# Altium PCB Updated MCU PCB.PcbDoc (part 1 of 2)
Units mil, origin at the board's own origin, x right, y up, seen from the top; angles counter-clockwise.
Board outline 6000 x 4000 mil, 2 copper layers (Top Layer, Bottom Layer); 43 components, 81 nets, 242 pads, 35 vias.
Unrouted connection lines stored in the file: 1.
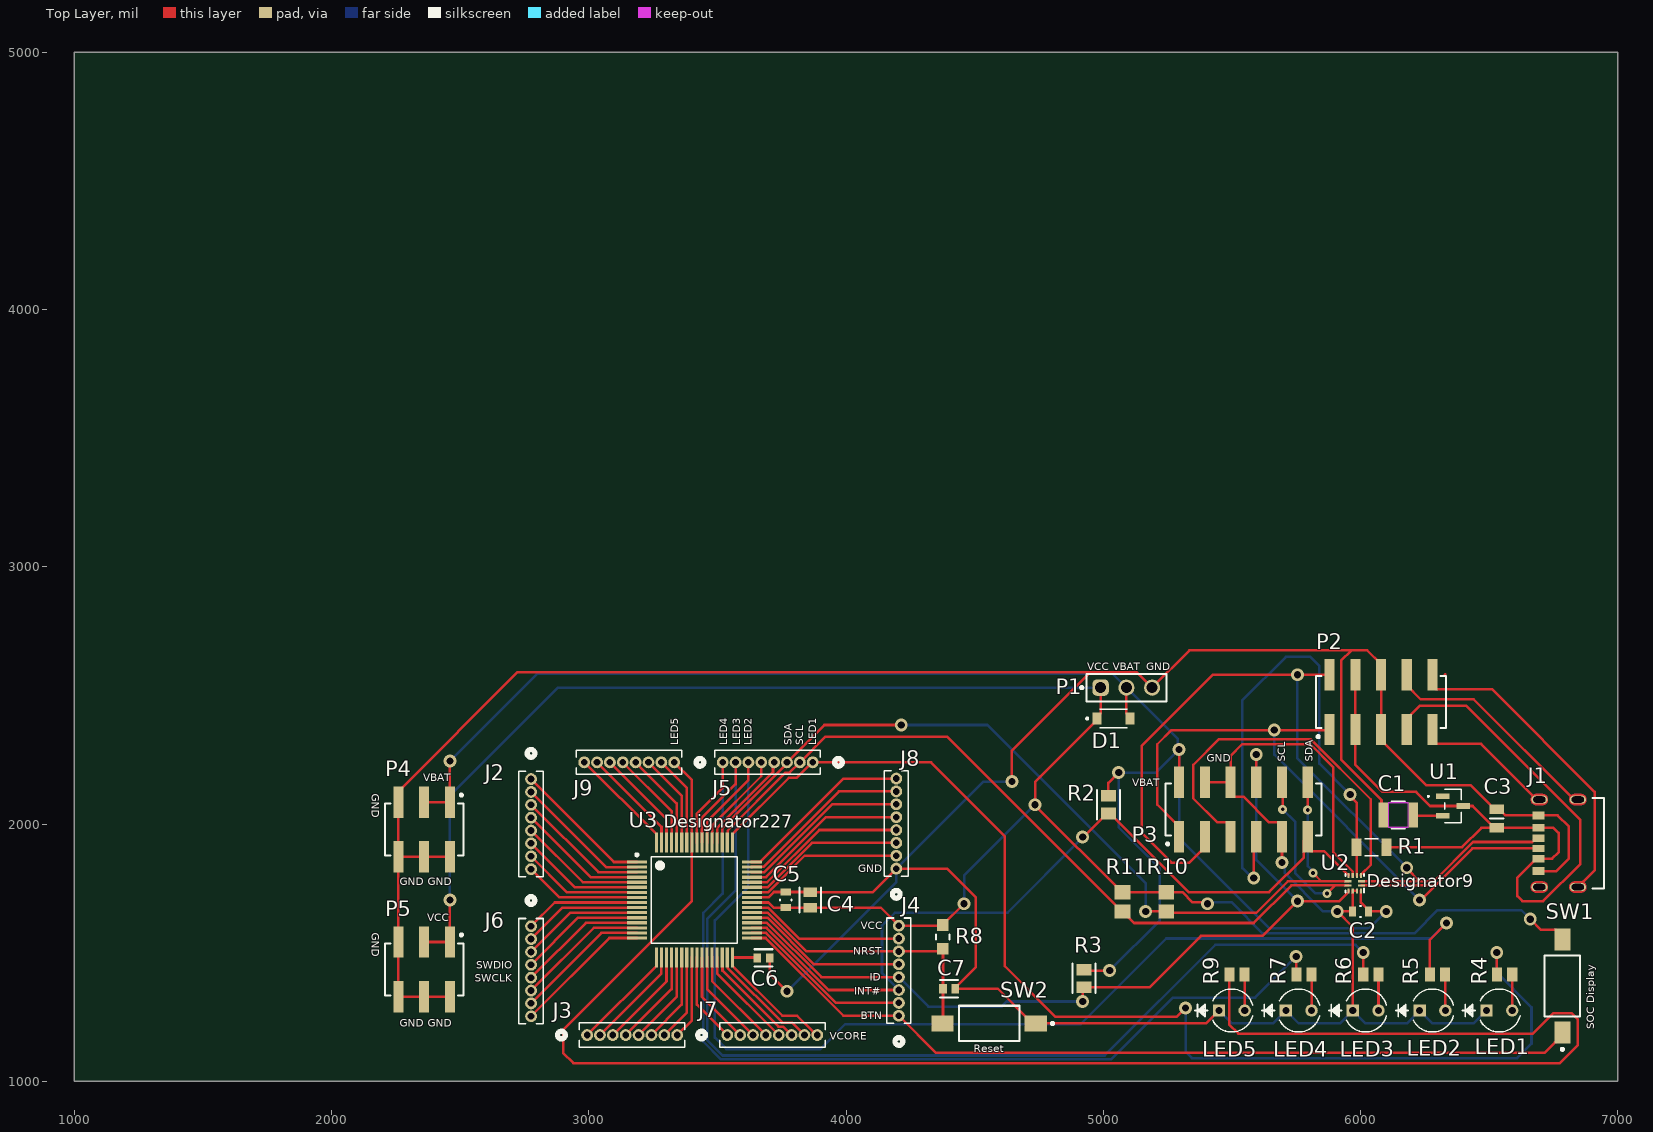
[diagram p0: Top Layer view]
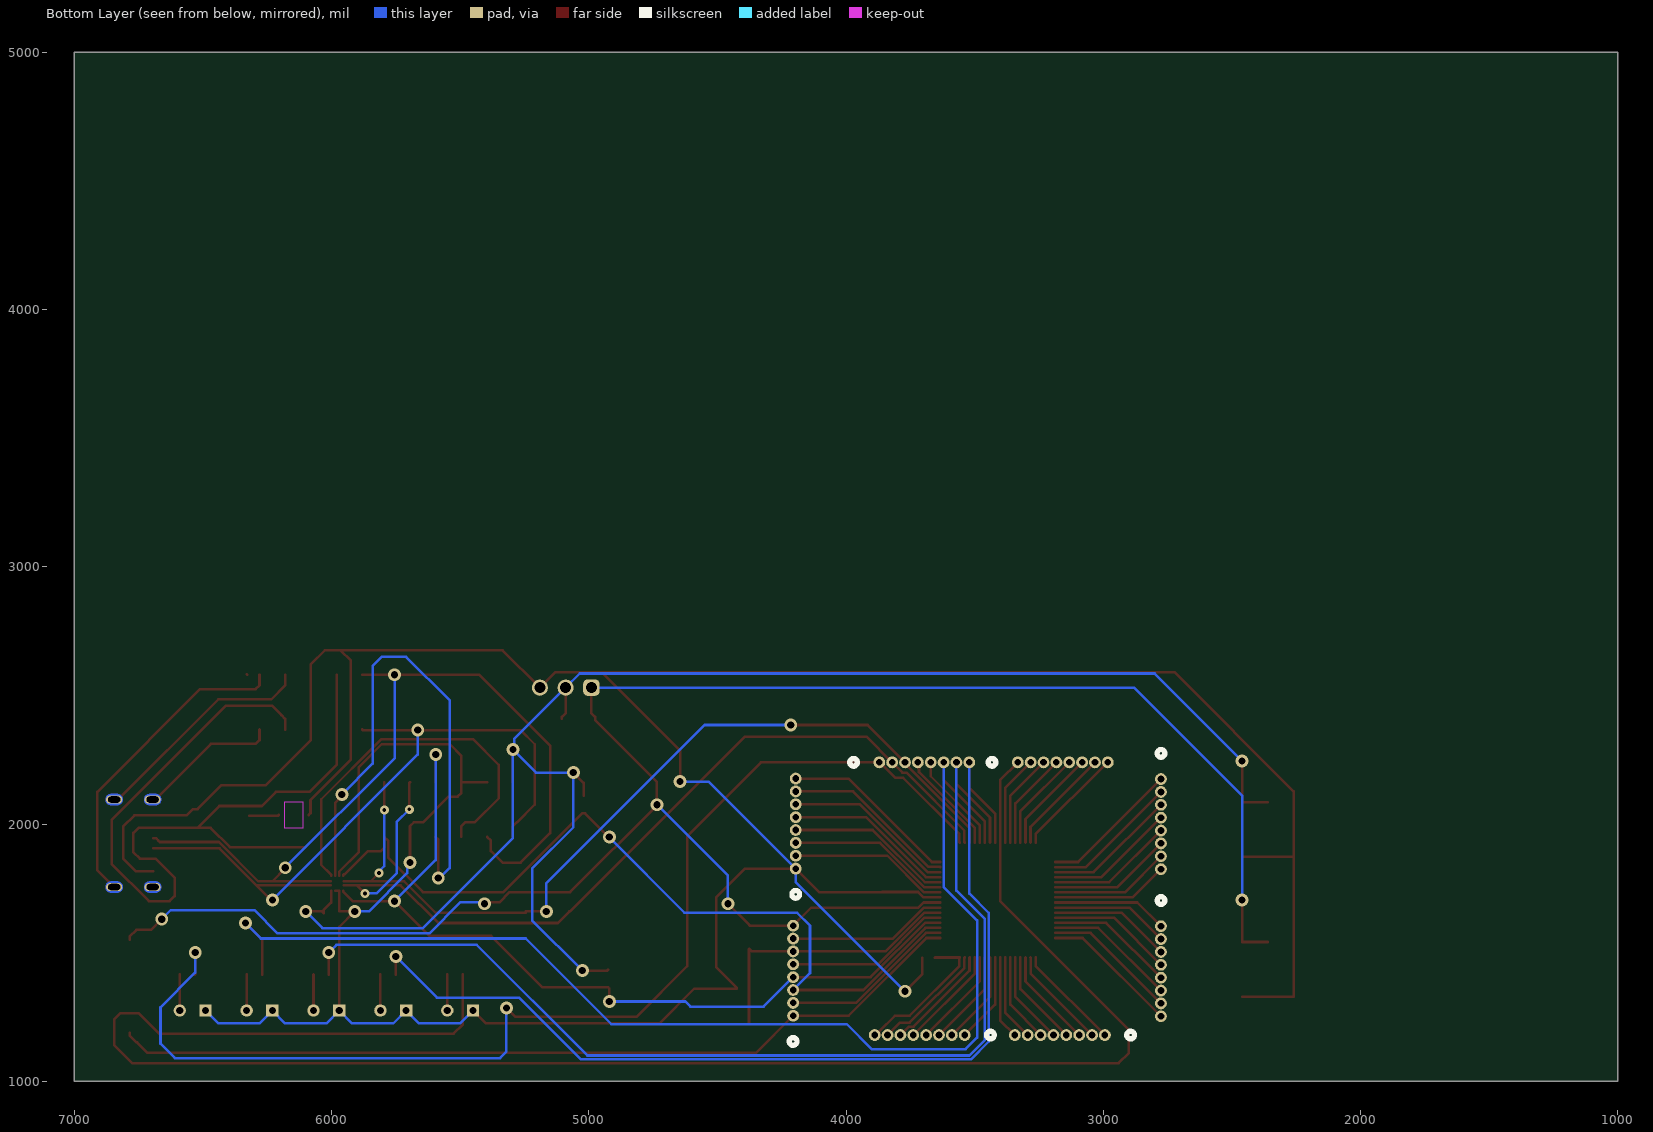
[diagram p1: Bottom Layer view, seen from below]
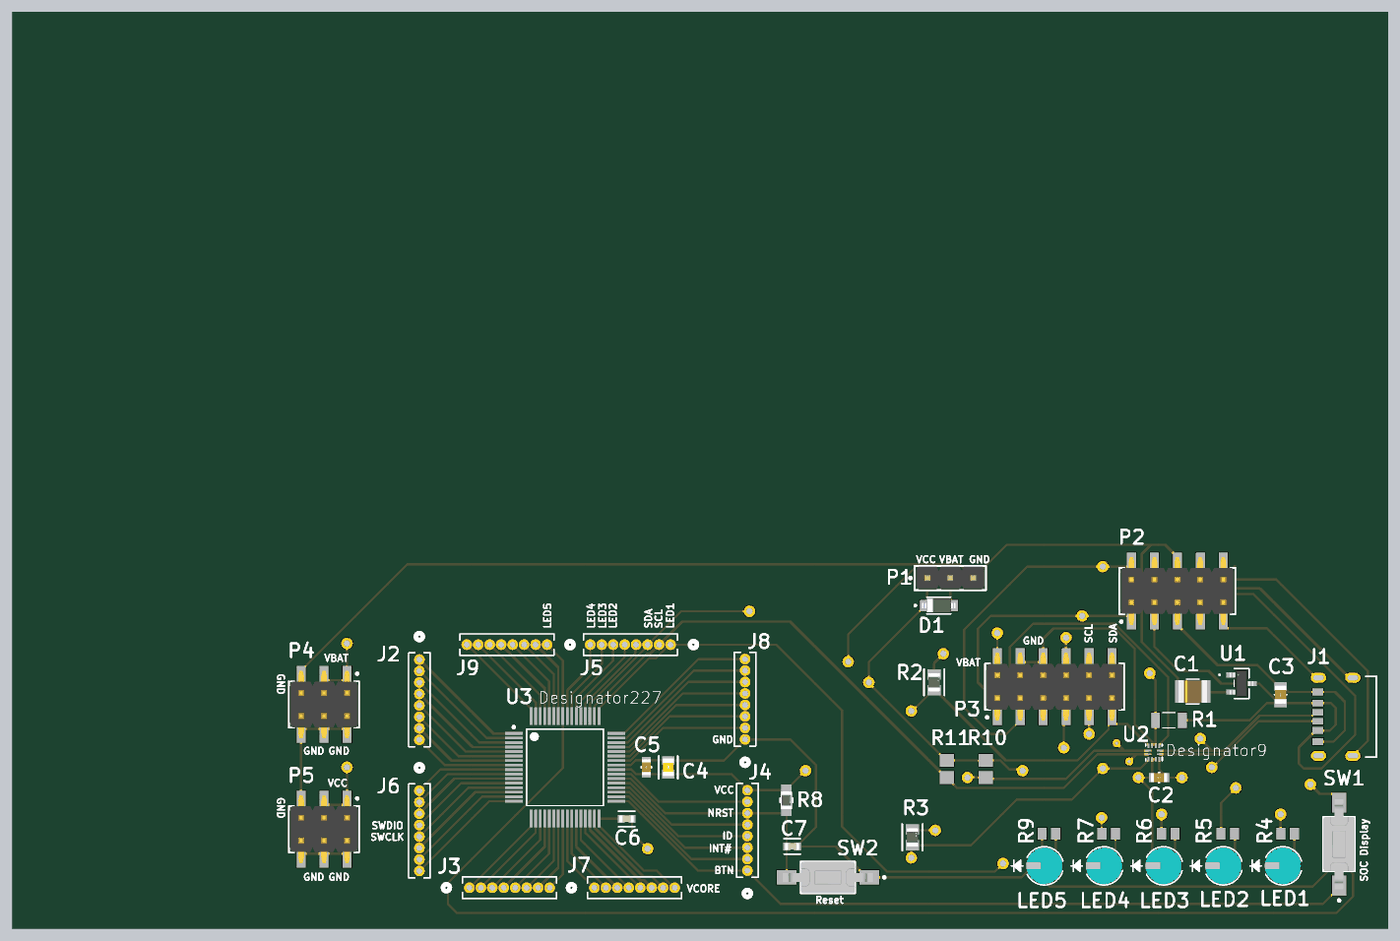
[diagram p2: 3D render of the assembled board from above, using the file's embedded part models]

## Layer stack, top to bottom
Top Solder: solder mask 0.4, Solder Resist, Dk 3.5
Top Layer: signal copper 1.4
Dielectric 1: dielectric 12.6, FR-4, Dk 4.8
Bottom Layer: signal copper 1.4
Bottom Solder: solder mask 0.4, Solder Resist, Dk 3.5

## Board outline
1000,1000 7000,1000 7000,5000 1000,5000

## Design rules (kind name [scope] priority, off if disabled: settings)
Clearance [All] p1: gap=5 ignorepadtopadclearanceinfootprint=FALSE
MinimumSolderMaskSliver [All] p1: minsoldermaskwidth=5
PolygonConnect [All] p1: connectstyle=Relief reliefconductorwidth=10 reliefentries=4 polygonreliefangle="90 Angle" airgapwidth=10
RoutingVias [All] p1: holewidth=28 width=50 viastyle="Through Hole" minholewidth=28 minwidth=50 maxholewidth=28 maxwidth=50
SilkToSilkClearance [All] p1: silktosilkclearance=5
SolderMaskExpansion [All] p1: expansion=4 istentingtop=FALSE
SupplyNets "Schematic Supply Nets_2" [InNet('VCC')] p1: voltage=0.000
SupplyNets "Schematic Supply Nets_1" [InNet('VDD')] p2: voltage=0.000
SupplyNets "Schematic Supply Nets" [InNet('ADDR')] p3: voltage=0.000
Width [All] p1: maxlimit=1000 minlimit=5 preferedwidth=10
28 further rules are at their usual default settings.

## Classes and differential pairs
component class "TUSB320 Schematic": C1 C2 C3 J1 P1 P2 P3 R1 R2 R3 U1 U2
component class "MCU Schematic": C4 C5 C6 C7 D1 J2 J3 J4 J5 J6 J7 J8 J9 LED1 LED2 LED3 LED4 LED5 P4 P5 R4 R5 R6 R7 R8 R9 R10 R11 SW1 SW2 U3

## Components (designator, comment, footprint, x,y, rotation, side; value= is the part's Value field where it differs from the comment)
C1 "150uF" CAP_CL32_SAM 6146.82,2035 r0 top
C2 "GRMJN65C1H104GE01J" FP-GRMJN6-0_1-MFG 6000,1660 r180 top
C3 "CC0805JKX7R9BB105" FP-CC0805-0_2-1_45-MFG 6530,2021.42 r90 top
C4 "C0805C106J8RACAUTO" FP-C0805C106J8RACAUTO-MFG 3860.58,1704.6 r90 top
C5 "GRMJN65C1H104GE01J" FP-GRMJN6-0_1-MFG 3765.58,1705.11 r90 top
C6 "C0603C474J4RACTU" FP-C0603C-CF-MFG 3679.2,1479.6 r0 top value="0.47 μF"
C7 "C0603C103J5RACTU" FP-C0603C-CF-MFG 4400.58,1359.6 r0 top value="10,000 pF"
D1 "MMSD914T1G" DIO_MMSD914T1G 5040,2410 r0 top
J1 "USB4125-GF-A-0190_REVA2" GCT_USB4125-GF-A-0190_REVA2 6813.5,1925.08 r90 top
J2 "GRPB081VWVN-RC" CONN8_VWVN-RC_SUL 2775.58,2174.6 r270 top
J3 "GRPB081VWVN-RC" CONN8_VWVN-RC_SUL 2993.53,1179.6 r0 top
J4 "GRPB081VWVN-RC" CONN8_VWVN-RC_SUL 4205.58,1254.6 r90 top
J5 "GRPB081VWVN-RC" CONN8_VWVN-RC_SUL 3870.58,2239.6 r180 top
J6 "GRPB081VWVN-RC" CONN8_VWVN-RC_SUL 2775.58,1602.6 r270 top
J7 "GRPB081VWVN-RC" CONN8_VWVN-RC_SUL 3538.53,1179.6 r0 top
J8 "GRPB081VWVN-RC" CONN8_VWVN-RC_SUL 4195.58,1826.6 r90 top
J9 "GRPB081VWVN-RC" CONN8_VWVN-RC_SUL 3332.14,2239.6 r180 top
LED1 "LTW-420D7" LED_LTW-420D7_LTO 6490,1275 r0 top
LED2 "LTW-420D7" LED_LTW-420D7_LTO 6230,1275 r0 top
LED3 "LTW-420D7" LED_LTW-420D7_LTO 5970,1275 r0 top
LED4 "LTW-420D7" LED_LTW-420D7_LTO 5710,1275 r0 top
LED5 "LTW-420D7" LED_LTW-420D7_LTO 5450,1275 r0 top
P1 "61300311121" 61300311121 5090,2530 r0 top
P2 "61001021121" 61001021121 6080,2473.7 r0 top
P3 "61001221121" 61001221121 5545,2056.3 r0 top
P4 "61000621121" 61000621121 2360,1978.7 r180 top
P5 "61000621121" 61000621121 2360,1435 r180 top
R1 "RT1206BRE07900KL" RESC3116X65N 6043.27,1910 r0 top value=900K
R2 "RG2012P-204-B-T5" FP-RG2012-IPC_B 5020,2075.53 r90 top
R3 "RG2012P-204-B-T5" FP-RG2012-IPC_B 4925,1399.47 r90 top
R4 "ERA6AEB331V" RESC2013X60X40LL20T25 6560.47,1415 r0 top value=330
R5 "ERA6AEB331V" RESC2013X60X40LL20T25 6299.53,1415 r0 top value=330
R6 "ERA6AEB331V" RESC2013X60X40LL20T25 6040.47,1415 r0 top value=330
R7 "ERA6AEB331V" RESC2013X60X40LL20T25 5780.47,1415 r0 top value=330
R8 "ERA-6AEB473V" FP-ERA6A-MFG 4375.58,1560.86 r90 top
R9 "ERA6AEB331V" RESC2013X60X40LL20T25 5520,1415 r0 top value=330
R10 "ERA6AEB472V" RESC2013X60X40ML20T25 5245,1697.6 r90 top value=4.7k
R11 "ERA6AEB472V" RESC2013X60X40ML20T25 5075,1697.6 r90 top value=4.7k
SW1 "FSMSM" TECO-FSMSM-2_V 6785,1370 r90 top
SW2 "FSMSM" TECO-FSMSM-2_V 4556.49,1224.6 r180 top
U1 "BSS138LT1G" SOT-23-3_1P4X3P040_ONS 6360,2070 r270 top
U2 "TI TUSB320" RWB0012A 5977.87,1769.53 r180 top
U3 "XMSM0G3507SPM" PM0064A-IPC_A 3410.58,1704.6 r0 top

## Footprints (in the part's own frame and the unit in brackets; to place one, negate y for a bottom-side part, rotate by r counter-clockwise, add the part's x,y. Pads: shape width x height; smd on the part's side, far side on the other; paste and mask are expansions set on the pad)
61000621121 [mm] "Pin Header, pitch 2.54 mm, SMD, Vertical, dual row, 6p"
  rect 1x3.1 smd: 1(-2.54,-2.7) 2(-2.54,2.7) 3(0,-2.7) 4(0,2.7) 5(2.54,-2.7) 6(2.54,2.7)
  silkscreen extent -3.89,-3.52 3.89,2.57, body extent -3.81,-3.75 3.81,3.75, height 9.62
61001021121 [mm] "Pin Header, pitch 2.54 mm, SMD, Vertical, dual row, 10p"
  rect 1x3.1 smd: 1(-5.08,-2.7) 2(-5.08,2.7) 3(-2.54,-2.7) 4(-2.54,2.7) 5(0,-2.7) 6(0,2.7) 7(2.54,-2.7) 8(2.54,2.7) 9(5.08,-2.7) 10(5.08,2.7)
  silkscreen extent -6.43,-3.52 6.43,2.57, body extent -6.35,-3.75 6.35,3.75, height 9.62
61001221121 [mm] "Pin Header, pitch 2.54 mm, SMD, Vertical, dual row, 12p"
  rect 1x3.1 smd: 1(-6.35,-2.7) 2(-6.35,2.7) 3(-3.81,-2.7) 4(-3.81,2.7) 5(-1.27,-2.7) 6(-1.27,2.7) 7(1.27,-2.7) 8(1.27,2.7) 9(3.81,-2.7) 10(3.81,2.7) 11(6.35,-2.7) 12(6.35,2.7)
  silkscreen extent -7.7,-3.52 7.7,2.57, body extent -7.62,-3.75 7.62,3.75, height 9.62
61300311121 [mm] "Pin Header, pitch 2.54 mm, THT, Vertical, single row, 3p"
  rrect50% 1.6x1.6 hole 1.1: 1(-2.54,0)
  round 1.6 hole 1.1: 2(0,0) 3(2.54,0)
  silkscreen extent -4.53,-1.35 3.96,1.35, body extent -3.81,-1.27 3.81,1.27, height 8.57
CAP_CL32_SAM [mm]
  rect 0.956x2.5 smd paste+0 mask+0: 1(-1.478,0) 2(1.478,0)
  Top Layer keep-out region: -0.949,-1.199 -0.949,1.199 0.949,1.199 0.949,-1.199
  Keep-Out Layer region: -0.949,-1.25 -0.949,1.25 0.949,1.25 0.949,-1.25
  silkscreen extent -0.69,-1.38 0.69,1.38, body extent -1.6,-1.25 1.6,1.25, height 1
CONN8_VWVN-RC_SUL [mil]
  round 46 / inner round 60 / far side round 46 hole 26 paste-99999 mask+0: 1(0,0) 2(50,0) 3(100,0) 4(150,0) 5(200,0) 6(250,0) 7(300,0) 8(350,0)
  silkscreen extent -115,-47 380,47
DIO_MMSD914T1G [mm]
  rect 0.915x1.22 smd: A(1.637,0) K(-1.637,0)
  silkscreen extent -2.7,-0.92 1.35,0.92, body extent -1.84,-0.8 1.84,0.8, height 1.35
FP-C0603C-CF-MFG [mm]
  rect 0.75x0.9 smd paste+0 mask+0: 1(-0.6,0) 2(0.6,0)
  silkscreen extent -0.87,-0.85 0.88,0.85, body extent -1.2,-0.6 1.2,0.6, height 0.25
FP-C0805C106J8RACAUTO-MFG [mm]
  rect 0.95x1.35 smd paste+0 mask+0: 1(-0.75,0) 2(0.75,0)
  silkscreen extent -1.25,-1.05 1.25,1.05, body extent -1.4,-0.85 1.4,0.85, height 0.25
FP-CC0805-0_2-1_45-MFG [mm]
  rect 0.95x1.4 smd paste+0 mask+0: 1(-0.925,0) 2(0.925,0)
  silkscreen extent 0,-0.67 0,0.67, body extent -1.73,-1.17 1.73,1.17, height 0.25
FP-ERA6A-MFG [mm]
  rect 1.15x1.15 smd paste+0 mask+0: 1(-1.175,0) 2(1.175,0)
  silkscreen extent -0.23,-0.67 0.23,0.67, body extent -1.85,-0.77 1.85,0.77, height 0.25
FP-GRMJN6-0_1-MFG [mm]
  rect 0.7x1 smd paste+0 mask+0: 1(-0.775,0) 2(0.775,0)
  silkscreen extent -0.05,-0.55 0.05,0.55, body extent -1.22,-0.65 1.22,0.65, height 0.25
FP-RG2012-IPC_B [mil]
  rect 45.47x57.33 smd paste+0 mask+0: 1(-34.47,0) 2(34.47,0)
  silkscreen extent -57,-44 57,44, body extent -67,-39 67,39, height 10
GCT_USB4125-GF-A-0190_REVA2 [mm]
  rect 0.7x1.2 smd: A5(-0.5,3.08) B5(0.5,3.08)
  rect 0.76x1.2 smd: A9(1.52,3.08) B9(-1.52,3.08)
  rect 0.8x1.2 smd: A12(2.75,3.08) B12(-2.75,3.08)
  oval 0.8x1.6 hole 0.6 slot 1.2 at 90 deg mask+0: S1(-4.32,3) S2(4.32,3) S3(-4.32,-0.8) S4(4.32,-0.8)
  Top Layer region: -4.291,0.049 -4.263,0.047 -4.234,0.043 -4.206,0.038 -4.178,0.031 -4.15,0.023 -4.123,0.013 -4.096,0.002 -4.07,-0.01 -4.045,-0.024 -4.02,-0.039 -3.997,-0.055 -3.974,-0.073 -3.952,-0.091 -3.931,-0.111 -3.911,-0.132 -3.893,-0.154 -3.875,-0.177 -3.859,-0.2 -3.844,-0.225 -3.83,-0.25 -3.818,-0.276 -3.807,-0.303 -3.797,-0.33 -3.789,-0.358 -3.782,-0.386 -3.777,-0.414 -3.773,-0.443 -3.771,-0.471 -3.77,-0.5 -3.77,-1.1 -3.771,-1.129 -3.773,-1.157 -3.777,-1.186 -3.782,-1.214 -3.789,-1.242 -3.797,-1.27 -3.807,-1.297 -3.818,-1.324 -3.83,-1.35 -3.844,-1.375 -3.859,-1.4 -3.875,-1.423 -3.893,-1.446 -3.911,-1.468 -3.931,-1.489 -3.952,-1.509 -3.974,-1.527 -3.997,-1.545 -4.02,-1.561 -4.045,-1.576 -4.07,-1.59 -4.096,-1.602 -4.123,-1.613 -4.15,-1.623 -4.178,-1.631 -4.206,-1.638 -4.234,-1.643 -4.263,-1.647 -4.291,-1.649 -4.32,-1.65 -4.349,-1.649 -4.377,-1.647 -4.406,-1.643 -4.434,-1.638 -4.462,-1.631 -4.49,-1.623 -4.517,-1.613 -4.544,-1.602 -4.57,-1.59 -4.595,-1.576 -4.62,-1.561 -4.643,-1.545 -4.666,-1.527 -4.688,-1.509 -4.709,-1.489 -4.729,-1.468 -4.747,-1.446 -4.765,-1.423 -4.781,-1.4 -4.796,-1.375 -4.81,-1.35 -4.822,-1.324 -4.833,-1.297 -4.843,-1.27 -4.851,-1.242 -4.858,-1.214 -4.863,-1.186 -4.867,-1.157 -4.869,-1.129 -4.87,-1.1 -4.87,-0.5 -4.869,-0.471 -4.867,-0.443 -4.863,-0.414 -4.858,-0.386 -4.851,-0.358 -4.843,-0.33 -4.833,-0.303 -4.822,-0.276 -4.81,-0.25 -4.796,-0.225 -4.781,-0.2 -4.765,-0.177 -4.747,-0.154 -4.729,-0.132 -4.709,-0.111 -4.688,-0.091 -4.666,-0.073 -4.643,-0.055 -4.62,-0.039 -4.595,-0.024 -4.57,-0.01 -4.544,0.002 -4.517,0.013 -4.49,0.023 -4.462,0.031 -4.434,0.038 -4.406,0.043 -4.377,0.047 -4.349,0.049 -4.32,0.05
  Top Layer region: 4.349,0.049 4.377,0.047 4.406,0.043 4.434,0.038 4.462,0.031 4.49,0.023 4.517,0.013 4.544,0.002 4.57,-0.01 4.595,-0.024 4.62,-0.039 4.643,-0.055 4.666,-0.073 4.688,-0.091 4.709,-0.111 4.729,-0.132 4.747,-0.154 4.765,-0.177 4.781,-0.2 4.796,-0.225 4.81,-0.25 4.822,-0.276 4.833,-0.303 4.843,-0.33 4.851,-0.358 4.858,-0.386 4.863,-0.414 4.867,-0.443 4.869,-0.471 4.87,-0.5 4.87,-1.1 4.869,-1.129 4.867,-1.157 4.863,-1.186 4.858,-1.214 4.851,-1.242 4.843,-1.27 4.833,-1.297 4.822,-1.324 4.81,-1.35 4.796,-1.375 4.781,-1.4 4.765,-1.423 4.747,-1.446 4.729,-1.468 4.709,-1.489 4.688,-1.509 4.666,-1.527 4.643,-1.545 4.62,-1.561 4.595,-1.576 4.57,-1.59 4.544,-1.602 4.517,-1.613 4.49,-1.623 4.462,-1.631 4.434,-1.638 4.406,-1.643 4.377,-1.647 4.349,-1.649 4.32,-1.65 4.291,-1.649 4.263,-1.647 4.234,-1.643 4.206,-1.638 4.178,-1.631 4.15,-1.623 4.123,-1.613 4.096,-1.602 4.07,-1.59 4.045,-1.576 4.02,-1.561 3.997,-1.545 3.974,-1.527 3.952,-1.509 3.931,-1.489 3.911,-1.468 3.893,-1.446 3.875,-1.423 3.859,-1.4 3.844,-1.375 3.83,-1.35 3.818,-1.324 3.807,-1.297 3.797,-1.27 3.789,-1.242 3.782,-1.214 3.777,-1.186 3.773,-1.157 3.771,-1.129 3.77,-1.1 3.77,-0.5 3.771,-0.471 3.773,-0.443 3.777,-0.414 3.782,-0.386 3.789,-0.358 3.797,-0.33 3.807,-0.303 3.818,-0.276 3.83,-0.25 3.844,-0.225 3.859,-0.2 3.875,-0.177 3.893,-0.154 3.911,-0.132 3.931,-0.111 3.952,-0.091 3.974,-0.073 3.997,-0.055 4.02,-0.039 4.045,-0.024 4.07,-0.01 4.096,0.002 4.123,0.013 4.15,0.023 4.178,0.031 4.206,0.038 4.234,0.043 4.263,0.047 4.291,0.049 4.32,0.05
  Top Layer region: -4.291,3.849 -4.263,3.847 -4.234,3.843 -4.206,3.838 -4.178,3.831 -4.15,3.823 -4.123,3.813 -4.096,3.802 -4.07,3.79 -4.045,3.776 -4.02,3.761 -3.997,3.745 -3.974,3.727 -3.952,3.709 -3.931,3.689 -3.911,3.668 -3.893,3.646 -3.875,3.623 -3.859,3.6 -3.844,3.575 -3.83,3.55 -3.818,3.524 -3.807,3.497 -3.797,3.47 -3.789,3.442 -3.782,3.414 -3.777,3.386 -3.773,3.357 -3.771,3.329 -3.77,3.3 -3.77,2.7 -3.771,2.671 -3.773,2.643 -3.777,2.614 -3.782,2.586 -3.789,2.558 -3.797,2.53 -3.807,2.503 -3.818,2.476 -3.83,2.45 -3.844,2.425 -3.859,2.4 -3.875,2.377 -3.893,2.354 -3.911,2.332 -3.931,2.311 -3.952,2.291 -3.974,2.273 -3.997,2.255 -4.02,2.239 -4.045,2.224 -4.07,2.21 -4.096,2.198 -4.123,2.187 -4.15,2.177 -4.178,2.169 -4.206,2.162 -4.234,2.157 -4.263,2.153 -4.291,2.151 -4.32,2.15 -4.349,2.151 -4.377,2.153 -4.406,2.157 -4.434,2.162 -4.462,2.169 -4.49,2.177 -4.517,2.187 -4.544,2.198 -4.57,2.21 -4.595,2.224 -4.62,2.239 -4.643,2.255 -4.666,2.273 -4.688,2.291 -4.709,2.311 -4.729,2.332 -4.747,2.354 -4.765,2.377 -4.781,2.4 -4.796,2.425 -4.81,2.45 -4.822,2.476 -4.833,2.503 -4.843,2.53 -4.851,2.558 -4.858,2.586 -4.863,2.614 -4.867,2.643 -4.869,2.671 -4.87,2.7 -4.87,3.3 -4.869,3.329 -4.867,3.357 -4.863,3.386 -4.858,3.414 -4.851,3.442 -4.843,3.47 -4.833,3.497 -4.822,3.524 -4.81,3.55 -4.796,3.575 -4.781,3.6 -4.765,3.623 -4.747,3.646 -4.729,3.668 -4.709,3.689 -4.688,3.709 -4.666,3.727 -4.643,3.745 -4.62,3.761 -4.595,3.776 -4.57,3.79 -4.544,3.802 -4.517,3.813 -4.49,3.823 -4.462,3.831 -4.434,3.838 -4.406,3.843 -4.377,3.847 -4.349,3.849 -4.32,3.85
  Top Layer region: 4.349,3.849 4.377,3.847 4.406,3.843 4.434,3.838 4.462,3.831 4.49,3.823 4.517,3.813 4.544,3.802 4.57,3.79 4.595,3.776 4.62,3.761 4.643,3.745 4.666,3.727 4.688,3.709 4.709,3.689 4.729,3.668 4.747,3.646 4.765,3.623 4.781,3.6 4.796,3.575 4.81,3.55 4.822,3.524 4.833,3.497 4.843,3.47 4.851,3.442 4.858,3.414 4.863,3.386 4.867,3.357 4.869,3.329 4.87,3.3 4.87,2.7 4.869,2.671 4.867,2.643 4.863,2.614 4.858,2.586 4.851,2.558 4.843,2.53 4.833,2.503 4.822,2.476 4.81,2.45 4.796,2.425 4.781,2.4 4.765,2.377 4.747,2.354 4.729,2.332 4.709,2.311 4.688,2.291 4.666,2.273 4.643,2.255 4.62,2.239 4.595,2.224 4.57,2.21 4.544,2.198 4.517,2.187 4.49,2.177 4.462,2.169 4.434,2.162 4.406,2.157 4.377,2.153 4.349,2.151 4.32,2.15 4.291,2.151 4.263,2.153 4.234,2.157 4.206,2.162 4.178,2.169 4.15,2.177 4.123,2.187 4.096,2.198 4.07,2.21 4.045,2.224 4.02,2.239 3.997,2.255 3.974,2.273 3.952,2.291 3.931,2.311 3.911,2.332 3.893,2.354 3.875,2.377 3.859,2.4 3.844,2.425 3.83,2.45 3.818,2.476 3.807,2.503 3.797,2.53 3.789,2.558 3.782,2.586 3.777,2.614 3.773,2.643 3.771,2.671 3.77,2.7 3.77,3.3 3.771,3.329 3.773,3.357 3.777,3.386 3.782,3.414 3.789,3.442 3.797,3.47 3.807,3.497 3.818,3.524 3.83,3.55 3.844,3.575 3.859,3.6 3.875,3.623 3.893,3.646 3.911,3.668 3.931,3.689 3.952,3.709 3.974,3.727 3.997,3.745 4.02,3.761 4.045,3.776 4.07,3.79 4.096,3.802 4.123,3.813 4.15,3.823 4.178,3.831 4.206,3.838 4.234,3.843 4.263,3.847 4.291,3.849 4.32,3.85
  Bottom Layer region: -4.291,0.049 -4.263,0.047 -4.234,0.043 -4.206,0.038 -4.178,0.031 -4.15,0.023 -4.123,0.013 -4.096,0.002 -4.07,-0.01 -4.045,-0.024 -4.02,-0.039 -3.997,-0.055 -3.974,-0.073 -3.952,-0.091 -3.931,-0.111 -3.911,-0.132 -3.893,-0.154 -3.875,-0.177 -3.859,-0.2 -3.844,-0.225 -3.83,-0.25 -3.818,-0.276 -3.807,-0.303 -3.797,-0.33 -3.789,-0.358 -3.782,-0.386 -3.777,-0.414 -3.773,-0.443 -3.771,-0.471 -3.77,-0.5 -3.77,-1.1 -3.771,-1.129 -3.773,-1.157 -3.777,-1.186 -3.782,-1.214 -3.789,-1.242 -3.797,-1.27 -3.807,-1.297 -3.818,-1.324 -3.83,-1.35 -3.844,-1.375 -3.859,-1.4 -3.875,-1.423 -3.893,-1.446 -3.911,-1.468 -3.931,-1.489 -3.952,-1.509 -3.974,-1.527 -3.997,-1.545 -4.02,-1.561 -4.045,-1.576 -4.07,-1.59 -4.096,-1.602 -4.123,-1.613 -4.15,-1.623 -4.178,-1.631 -4.206,-1.638 -4.234,-1.643 -4.263,-1.647 -4.291,-1.649 -4.32,-1.65 -4.349,-1.649 -4.377,-1.647 -4.406,-1.643 -4.434,-1.638 -4.462,-1.631 -4.49,-1.623 -4.517,-1.613 -4.544,-1.602 -4.57,-1.59 -4.595,-1.576 -4.62,-1.561 -4.643,-1.545 -4.666,-1.527 -4.688,-1.509 -4.709,-1.489 -4.729,-1.468 -4.747,-1.446 -4.765,-1.423 -4.781,-1.4 -4.796,-1.375 -4.81,-1.35 -4.822,-1.324 -4.833,-1.297 -4.843,-1.27 -4.851,-1.242 -4.858,-1.214 -4.863,-1.186 -4.867,-1.157 -4.869,-1.129 -4.87,-1.1 -4.87,-0.5 -4.869,-0.471 -4.867,-0.443 -4.863,-0.414 -4.858,-0.386 -4.851,-0.358 -4.843,-0.33 -4.833,-0.303 -4.822,-0.276 -4.81,-0.25 -4.796,-0.225 -4.781,-0.2 -4.765,-0.177 -4.747,-0.154 -4.729,-0.132 -4.709,-0.111 -4.688,-0.091 -4.666,-0.073 -4.643,-0.055 -4.62,-0.039 -4.595,-0.024 -4.57,-0.01 -4.544,0.002 -4.517,0.013 -4.49,0.023 -4.462,0.031 -4.434,0.038 -4.406,0.043 -4.377,0.047 -4.349,0.049 -4.32,0.05
  Bottom Layer region: 4.349,0.049 4.377,0.047 4.406,0.043 4.434,0.038 4.462,0.031 4.49,0.023 4.517,0.013 4.544,0.002 4.57,-0.01 4.595,-0.024 4.62,-0.039 4.643,-0.055 4.666,-0.073 4.688,-0.091 4.709,-0.111 4.729,-0.132 4.747,-0.154 4.765,-0.177 4.781,-0.2 4.796,-0.225 4.81,-0.25 4.822,-0.276 4.833,-0.303 4.843,-0.33 4.851,-0.358 4.858,-0.386 4.863,-0.414 4.867,-0.443 4.869,-0.471 4.87,-0.5 4.87,-1.1 4.869,-1.129 4.867,-1.157 4.863,-1.186 4.858,-1.214 4.851,-1.242 4.843,-1.27 4.833,-1.297 4.822,-1.324 4.81,-1.35 4.796,-1.375 4.781,-1.4 4.765,-1.423 4.747,-1.446 4.729,-1.468 4.709,-1.489 4.688,-1.509 4.666,-1.527 4.643,-1.545 4.62,-1.561 4.595,-1.576 4.57,-1.59 4.544,-1.602 4.517,-1.613 4.49,-1.623 4.462,-1.631 4.434,-1.638 4.406,-1.643 4.377,-1.647 4.349,-1.649 4.32,-1.65 4.291,-1.649 4.263,-1.647 4.234,-1.643 4.206,-1.638 4.178,-1.631 4.15,-1.623 4.123,-1.613 4.096,-1.602 4.07,-1.59 4.045,-1.576 4.02,-1.561 3.997,-1.545 3.974,-1.527 3.952,-1.509 3.931,-1.489 3.911,-1.468 3.893,-1.446 3.875,-1.423 3.859,-1.4 3.844,-1.375 3.83,-1.35 3.818,-1.324 3.807,-1.297 3.797,-1.27 3.789,-1.242 3.782,-1.214 3.777,-1.186 3.773,-1.157 3.771,-1.129 3.77,-1.1 3.77,-0.5 3.771,-0.471 3.773,-0.443 3.777,-0.414 3.782,-0.386 3.789,-0.358 3.797,-0.33 3.807,-0.303 3.818,-0.276 3.83,-0.25 3.844,-0.225 3.859,-0.2 3.875,-0.177 3.893,-0.154 3.911,-0.132 3.931,-0.111 3.952,-0.091 3.974,-0.073 3.997,-0.055 4.02,-0.039 4.045,-0.024 4.07,-0.01 4.096,0.002 4.123,0.013 4.15,0.023 4.178,0.031 4.206,0.038 4.234,0.043 4.263,0.047 4.291,0.049 4.32,0.05
  Bottom Layer region: -4.291,3.849 -4.263,3.847 -4.234,3.843 -4.206,3.838 -4.178,3.831 -4.15,3.823 -4.123,3.813 -4.096,3.802 -4.07,3.79 -4.045,3.776 -4.02,3.761 -3.997,3.745 -3.974,3.727 -3.952,3.709 -3.931,3.689 -3.911,3.668 -3.893,3.646 -3.875,3.623 -3.859,3.6 -3.844,3.575 -3.83,3.55 -3.818,3.524 -3.807,3.497 -3.797,3.47 -3.789,3.442 -3.782,3.414 -3.777,3.386 -3.773,3.357 -3.771,3.329 -3.77,3.3 -3.77,2.7 -3.771,2.671 -3.773,2.643 -3.777,2.614 -3.782,2.586 -3.789,2.558 -3.797,2.53 -3.807,2.503 -3.818,2.476 -3.83,2.45 -3.844,2.425 -3.859,2.4 -3.875,2.377 -3.893,2.354 -3.911,2.332 -3.931,2.311 -3.952,2.291 -3.974,2.273 -3.997,2.255 -4.02,2.239 -4.045,2.224 -4.07,2.21 -4.096,2.198 -4.123,2.187 -4.15,2.177 -4.178,2.169 -4.206,2.162 -4.234,2.157 -4.263,2.153 -4.291,2.151 -4.32,2.15 -4.349,2.151 -4.377,2.153 -4.406,2.157 -4.434,2.162 -4.462,2.169 -4.49,2.177 -4.517,2.187 -4.544,2.198 -4.57,2.21 -4.595,2.224 -4.62,2.239 -4.643,2.255 -4.666,2.273 -4.688,2.291 -4.709,2.311 -4.729,2.332 -4.747,2.354 -4.765,2.377 -4.781,2.4 -4.796,2.425 -4.81,2.45 -4.822,2.476 -4.833,2.503 -4.843,2.53 -4.851,2.558 -4.858,2.586 -4.863,2.614 -4.867,2.643 -4.869,2.671 -4.87,2.7 -4.87,3.3 -4.869,3.329 -4.867,3.357 -4.863,3.386 -4.858,3.414 -4.851,3.442 -4.843,3.47 -4.833,3.497 -4.822,3.524 -4.81,3.55 -4.796,3.575 -4.781,3.6 -4.765,3.623 -4.747,3.646 -4.729,3.668 -4.709,3.689 -4.688,3.709 -4.666,3.727 -4.643,3.745 -4.62,3.761 -4.595,3.776 -4.57,3.79 -4.544,3.802 -4.517,3.813 -4.49,3.823 -4.462,3.831 -4.434,3.838 -4.406,3.843 -4.377,3.847 -4.349,3.849 -4.32,3.85
  Bottom Layer region: 4.349,3.849 4.377,3.847 4.406,3.843 4.434,3.838 4.462,3.831 4.49,3.823 4.517,3.813 4.544,3.802 4.57,3.79 4.595,3.776 4.62,3.761 4.643,3.745 4.666,3.727 4.688,3.709 4.709,3.689 4.729,3.668 4.747,3.646 4.765,3.623 4.781,3.6 4.796,3.575 4.81,3.55 4.822,3.524 4.833,3.497 4.843,3.47 4.851,3.442 4.858,3.414 4.863,3.386 4.867,3.357 4.869,3.329 4.87,3.3 4.87,2.7 4.869,2.671 4.867,2.643 4.863,2.614 4.858,2.586 4.851,2.558 4.843,2.53 4.833,2.503 4.822,2.476 4.81,2.45 4.796,2.425 4.781,2.4 4.765,2.377 4.747,2.354 4.729,2.332 4.709,2.311 4.688,2.291 4.666,2.273 4.643,2.255 4.62,2.239 4.595,2.224 4.57,2.21 4.544,2.198 4.517,2.187 4.49,2.177 4.462,2.169 4.434,2.162 4.406,2.157 4.377,2.153 4.349,2.151 4.32,2.15 4.291,2.151 4.263,2.153 4.234,2.157 4.206,2.162 4.178,2.169 4.15,2.177 4.123,2.187 4.096,2.198 4.07,2.21 4.045,2.224 4.02,2.239 3.997,2.255 3.974,2.273 3.952,2.291 3.931,2.311 3.911,2.332 3.893,2.354 3.875,2.377 3.859,2.4 3.844,2.425 3.83,2.45 3.818,2.476 3.807,2.503 3.797,2.53 3.789,2.558 3.782,2.586 3.777,2.614 3.773,2.643 3.771,2.671 3.77,2.7 3.77,3.3 3.771,3.329 3.773,3.357 3.777,3.386 3.782,3.414 3.789,3.442 3.797,3.47 3.807,3.497 3.818,3.524 3.83,3.55 3.844,3.575 3.859,3.6 3.875,3.623 3.893,3.646 3.911,3.668 3.931,3.689 3.952,3.709 3.974,3.727 3.997,3.745 4.02,3.761 4.045,3.776 4.07,3.79 4.096,3.802 4.123,3.813 4.15,3.823 4.178,3.831 4.206,3.838 4.234,3.843 4.263,3.847 4.291,3.849 4.32,3.85
  silkscreen extent -4.47,-3.4 4.47,-2.25
LED_LTW-420D7_LTO [mil]
  rect 48x48 / inner round 60 / far side rect 48x48 hole 28 paste-99999 mask+0: 1(0,0)
  round 48 / inner round 60 / far side round 48 hole 28 paste-99999 mask+0: 2(100,0)
  silkscreen extent -94,-83 131,83, body extent -29,-78 128,78, height 248
PM0064A-IPC_A [mm]
  rect 1.955x0.312 smd paste+0 mask+0: 1(-5.675,3.75) 2(-5.675,3.25) 3(-5.675,2.75) 4(-5.675,2.25) 5(-5.675,1.75) 6(-5.675,1.25) 7(-5.675,0.75) 8(-5.675,0.25) 9(-5.675,-0.25) 10(-5.675,-0.75) 11(-5.675,-1.25) 12(-5.675,-1.75) 13(-5.675,-2.25) 14(-5.675,-2.75) 15(-5.675,-3.25) 16(-5.675,-3.75) 33(5.675,-3.75) 34(5.675,-3.25) 35(5.675,-2.75) 36(5.675,-2.25) 37(5.675,-1.75) 38(5.675,-1.25) 39(5.675,-0.75) 40(5.675,-0.25) 41(5.675,0.25) 42(5.675,0.75) 43(5.675,1.25) 44(5.675,1.75) 45(5.675,2.25) 46(5.675,2.75) 47(5.675,3.25) 48(5.675,3.75)
  rect 0.312x1.955 smd paste+0 mask+0: 17(-3.75,-5.675) 18(-3.25,-5.675) 19(-2.75,-5.675) 20(-2.25,-5.675) 21(-1.75,-5.675) 22(-1.25,-5.675) 23(-0.75,-5.675) 24(-0.25,-5.675) 25(0.25,-5.675) 26(0.75,-5.675) 27(1.25,-5.675) 28(1.75,-5.675) 29(2.25,-5.675) 30(2.75,-5.675) 31(3.25,-5.675) 32(3.75,-5.675) 49(3.75,5.675) 50(3.25,5.675) 51(2.75,5.675) 52(2.25,5.675) 53(1.75,5.675) 54(1.25,5.675) 55(0.75,5.675) 56(0.25,5.675) 57(-0.25,5.675) 58(-0.75,5.675) 59(-1.25,5.675) 60(-1.75,5.675) 61(-2.25,5.675) 62(-2.75,5.675) 63(-3.25,5.675) 64(-3.75,5.675)
  silkscreen extent -5.8,-4.25 4.25,4.58
RESC2013X60X40LL20T25 [mm] "Chip Resistor, 2-Leads, Body 2.00x1.25mm, IPC High Density"
  rect 1x1.35 smd: 1(-0.75,0) 2(0.75,0)
  body extent -1.1,-0.72 1.1,0.72, height 0.6
RESC2013X60X40ML20T25 [mm] "Chip Resistor, 2-Leads, Body 2.00x1.25mm, IPC Low Density"
  rect 1.4x1.55 smd: 1(-0.95,0) 2(0.95,0)
  body extent -1.1,-0.72 1.1,0.72, height 0.6
RESC3116X65N [mm]
  rect 0.97x1.73 smd: 1(-1.48,0) 2(1.48,0)
  silkscreen extent -0.67,-0.85 0.67,0.85
RWB0012A [mm]
  rect 0.7x0.2 smd paste-0.337 mask+0.051: 1(-0.65,0.2) 2(-0.65,-0.2) 7(0.65,-0.2) 8(0.65,0.2)
  rect 0.2x0.5 smd paste+0 mask+0.051: 3(-0.6,-0.75) 4(-0.2,-0.75) 5(0.2,-0.75) 6(0.6,-0.75) 9(0.6,0.75) 10(0.2,0.75) 11(-0.2,0.75) 12(-0.6,0.75)
  silkscreen extent -0.92,-0.91 0.92,0.91
SOT-23-3_1P4X3P040_ONS [mil]
  rect 22x52 smd paste+0 mask+0: 1(-37.5,-40) 2(37.5,-40) 3(0,40)
  silkscreen extent -65,-99 65,33, body extent -60,-52 60,52, height 44
TECO-FSMSM-2_V [mm] "SMD, 2-Leads, Body 6x3.5mm, Pitch 9.19mm"
  rect 2.2x1.6 smd: 1(-4.595,0)
  rect 2.18x1.6 smd: 2(4.595,0)
  silkscreen extent -6.37,-1.75 3,1.75, body extent -4.98,-1.75 4.98,1.75, height 4.4

## Part data
C1: library part CL32A157MQVNNNE, "No Description Available", Mfr_Name=Samsung
C2 C5: library part CMP-00260-135708738-1, "GRMJN65C1H104GE01J Multilayer Ceramic Capacitor, 0.1 uF, 50 V, ± 2%, C0G (NP0), 0704 [1810 Metric]", Capacitance=100nF, Case/Package=0704, Max Operating Temperature=125°C, Min Operating Temperature=-55°C, Temperature Coefficient=30ppm/°C, Tolerance=2%, Voltage Rating=50V, Height=650µm, Lifecycle Status=Production, Material=Ceramic, NexarPartId=135708738
C3: library part CMP-03422-001528-1, "CAP CER 1UF 50V X7R 0805", Capacitance=1uF, Case Code (Imperial)=0805, Case Code (Metric)=2012, Max Operating Temperature=125°C, Min Operating Temperature=-55°C, Tolerance=5%, Voltage Rating=50V, Case/Package=0805, Mount="Surface Mount", Packaging="Cut Tape"
C4: library part CMP-03020-034708-1, "CAP CER 10UF 10V X7R 0805", Capacitance=10uF, Case Code (Imperial)=0805, Case Code (Metric)=2012, Max Operating Temperature=125°C, Min Operating Temperature=-55°C, Ratings=AEC-Q200, Tolerance=5%, Voltage Rating=10V, Case/Package=0805, Mount="Surface Mount", Packaging="Tape and Reel", RoHS Compliant=Yes
C6: library part CMP-1035-02699-3, "CAP CER 0.47UF 16V X7R 0603", Capacitance="0.47 μF", Manufacturer=KEMET, Package=C0603C-CF, Temperature="-55°C to +125°C", Temperature Characteristic=X7R, Temperature Coefficient=30ppm/°C, Temperature Range High=+125°C, Temperature Range Low=-55°C, Tolerance=0.05, Voltage Rating="16 V", Automotive=Yes, Automotive Grade="Grade 1", Category=Cap, ComponentLink2Description=Datasheet, ComponentLink2URL=https://api.kemet.com/component-edge/download/datasheet/C0603C100J5GACAUTO.pdf, Device Class L1="Passive Components", Device Class L2=Capacitors, Device Class L3="Ceramic Capacitors", Digikey Description="CAP CER 0.47UF 16V X7R 0603", Height=0.87mm, Lead Free=Yes, Manufacturer Part Number=C0603C474J4RACTU, Material=Ceramic, Mouser Description="Multilayer Ceramic Capacitors MLCC - SMD/SMT .47UF 16V 5% 0603", Octopart=https://octopart.com/c0603c474j4ractu-kemet-15711632, RoHS=TRUE
C7: library part CMP-2006-03817-3, "Capacitor; Ceramic; Cap; .010uF; Tol 5%; SMT; Vol-Rtg 50V; X7R; Tape and Reel", Capacitance="10,000 pF", Manufacturer=KEMET, Package=C0603C-CF, Temperature="-55°C to +125°C", Temperature Characteristic=X7R, Temperature Coefficient=30ppm/°C, Temperature Range High=+125°C, Temperature Range Low=-55°C, Tolerance=0.05, Voltage Rating="50 V", Automotive=Yes, Automotive Grade="Grade 1", Category=Cap, ComponentLink2Description=Datasheet, ComponentLink2URL=https://api.kemet.com/component-edge/download/datasheet/C0603C100J5GACAUTO.pdf, Device Class L1="Passive Components", Device Class L2=Capacitors, Device Class L3="Ceramic Capacitors", Digikey Description="Capacitor; Ceramic; Cap; .010uF; Tol 5%; SMT; Vol-Rtg 50V; X7R; Tape and Reel", Height=0.87mm, Lead Free=Yes, Manufacturer Part Number=C0603C103J5RACTU, Material=Ceramic, Mouser Description="Capacitor; Ceramic; Cap; .010uF; Tol 5%; SMT; Vol-Rtg 50V; X7R; Tape and Reel", Octopart=https://octopart.com/c0603c103j5ractu-kemet-91371, RoHS=TRUE
D1: "Diode Standard 100 V 200mA (DC) Surface Mount SOD-123", Package="SOD-123-2 ON Semiconductor", Check_prices=https://www.snapeda.com/parts/MMSD914T1G/Onsemi/view-part/?ref=eda, MF="ON Semiconductor", MP=MMSD914T1G, SnapEDA_Link=https://www.snapeda.com/parts/MMSD914T1G/Onsemi/view-part/?ref=snap
J1: "Type C Receptacle, Horizontal, SMT, For Power Charging Only", Package=None, Availability="No availability data", Check_prices=https://www.snapeda.com/parts/USB4125-GF-A-0190/Global%20Connector%20Technology/view-part/6227012/?ref=eda, MF="Global Connector Technology", MP=USB4125-GF-A-0190, Price=None, SnapEDA_Link=https://www.snapeda.com/parts/USB4125-GF-A-0190/Global%20Connector%20Technology/view-part/6227012/?ref=snap
J2 J3 J4 J5 J6 J7 J8 J9: "No Description Available", Mfr_Name=Sullins, RefDes=RefDes, Type=Type
LED1 LED2 LED3 LED4 LED5: "No Description Available", Mfr_Name=LITE-ON
P1: "WR-PHD Pin Header, THT, Vertical, pitch 2.54mm, 1 Row, 3P", Contact Resistance=20mOhm, Manufacturer="Wurth Elektronik", Operating Temperature Max=105°C, Operating Temperature Min=-40°C, Rated Current=3A, Withstanding Voltage=500V, Working Voltage=250V, Category="Board-to-Board Connectors", ComponentLink1Description="Website Link", ComponentLink1URL=https://www.we-online.com/redexpert/article/61300311121?ad, ComponentLink2Description="Datasheet Link", ComponentLink2URL=https://www.we-online.com/redexpert/spec/61300311121?ad, Gender="Pin Header", Manufacturer Part Number=61300311121, Match Code=WR-PHD, Mount="Through Hole", Number of Pins=3, Number of Rows=1, Orientation=Vertical, Packaging=Bag, Pitch=2.54mm
P2: "WR-PHD Pin Header, SMT, Vertical, pitch 2.54mm, 2 Row, 10P", Contact Resistance=20mOhm, Manufacturer="Wurth Elektronik", Operating Temperature Max=125°C, Operating Temperature Min=-40°C, Rated Current=3A, Withstanding Voltage=500V, Working Voltage=250V, Category="Board-to-Board Connectors", ComponentLink1Description="Website Link", ComponentLink1URL=https://www.we-online.com/redexpert/article/61001021121?ad, ComponentLink2Description="Datasheet Link", ComponentLink2URL=https://www.we-online.com/redexpert/spec/61001021121?ad, Gender="Pin Header", Manufacturer Part Number=61001021121, Match Code=WR-PHD, Mount="Surface Mount", Number of Pins=10, Number of Rows=2, Orientation=Vertical, Packaging=Tube, Pitch=2.54mm
P3: "WR-PHD Pin Header, SMT, Vertical, pitch 2.54mm, 2 Row, 12P", Contact Resistance=20mOhm, Manufacturer="Wurth Elektronik", Operating Temperature Max=125°C, Operating Temperature Min=-40°C, Rated Current=3A, Withstanding Voltage=500V, Working Voltage=250V, Category="Board-to-Board Connectors", ComponentLink1Description="Website Link", ComponentLink1URL=https://www.we-online.com/redexpert/article/61001221121?ad, ComponentLink2Description="Datasheet Link", ComponentLink2URL=https://www.we-online.com/redexpert/spec/61001221121?ad, Gender="Pin Header", Manufacturer Part Number=61001221121, Match Code=WR-PHD, Mount="Surface Mount", Number of Pins=12, Number of Rows=2, Orientation=Vertical, Packaging=Tube, Pitch=2.54mm
P4 P5: "WR-PHD Pin Header, SMT, Vertical, pitch 2.54mm, 2 Row, 6P", Contact Resistance=20mOhm, Manufacturer="Wurth Elektronik", Operating Temperature Max=125°C, Operating Temperature Min=-40°C, Rated Current=3A, Withstanding Voltage=500V, Working Voltage=250V, Category="Board-to-Board Connectors", ComponentLink1Description="Website Link", ComponentLink1URL=https://www.we-online.com/redexpert/article/61000621121?ad, ComponentLink2Description="Datasheet Link", ComponentLink2URL=https://www.we-online.com/redexpert/spec/61000621121?ad, Gender="Pin Header", Manufacturer Part Number=61000621121, Match Code=WR-PHD, Mount="Surface Mount", Number of Pins=6, Number of Rows=2, Orientation=Vertical, Packaging=Tube, Pitch=2.54mm
R1: Package=None, Availability=Unavailable, MP=RT1206BRE07900KL, Price=None
R2 R3: library part CMP-2001-02831-2, "Automotive Metal Thin Film Chip Resistor, 0805, 200kΩ, 0.1%, 25ppm/°C, 0.125W, 150V", Case Code (Imperial)=0805, Case Code (Metric)=2012, Max Operating Temperature=155°C, Max Power Dissipation=125mW, Min Operating Temperature=-55°C, Package Quantity=5000, Power Rating=100mW, Resistance=200k, Resistor Type="Thin Film", Temperature Coefficient=25ppm/°C, Tolerance=0.1%, Voltage Rating=100V, Voltage Rating (DC)=150V, Case/Package=0805, Height=0.02inch, Lead Free="Lead Free", Length=0.079inch, Number of Terminations=2, Packaging="Tape and Reel", RoHS Compliant=Yes, Series=RG, Termination=SMD/SMT, Width=1.25mm
R4 R5 R6 R7 R9: library part CMP-2001-00628-1, Manufacturer=Panasonic, Part Number=ERA6AEB331V
R8: library part CMP-2001-00645-2, Case Code (Imperial)=0805, Case Code (Metric)=2012, Max Operating Temperature=155°C, Max Power Dissipation=125mW, Min Operating Temperature=-55°C, Resistance=47kΩ, Temperature Coefficient=25ppm/°C, Tolerance=0.1%, Voltage Rating=100V, Case/Package=0805, Composition="Metal Film, Thin Film", Contact Plating=Tin, Depth=1.25mm, Features="Automotive AEC-Q200", Height=500µm, Lead Free="Lead Free", Length=2mm, Lifecycle Status=Production, Military Standard=Not, Mount="Surface Mount", NexarPartId=1264112, Number of Pins=2, Number of Terminations=2, Packaging="Cut Tape", Power Rating=125mW, Radiation Hardening=No, REACH SVHC="No SVHC", RoHS=Compliant, Schedule B="8533210045, 8533210045", Termination=SMD/SMT, Voltage Rating (DC)=100V, Weight=5.499807mg, Width=1.25mm
R10 R11: library part CMP-2001-00644-1, Case Code (Imperial)=0805, Case Code (Metric)=2012, Manufacturer=Panasonic, Manufacturer Part Number=ERA-6AEB472V, Max Operating Temperature=155°C, Max Power Dissipation=125mW, Min Operating Temperature=-55°C, Package Quantity=1, Ratings=AEC-Q200, Resistance Tolerance=0.1%, Resistor Type="Thin Film", Supplier Part Number=667-ERA-6AEB472V, Temperature Coefficient=25ppm/°C, Voltage Rating=100V, Case/Package=0805, Category="Chip SMD Resistors", ComponentLink1Description=https://datasheet.ciiva.com/11811/0900766b80beefcc-11811885.pdf?src-supplier=Rs, ComponentLink1URL=https://datasheet.ciiva.com/11811/0900766b80beefcc-11811885.pdf?src-supplier=Rs, ComponentLink2Description=https://datasheet.ciiva.com/9195/aoa0000ce26-9195772.pdf?src-supplier=Avnet, ComponentLink2URL=https://datasheet.ciiva.com/9195/aoa0000ce26-9195772.pdf?src-supplier=Avnet, ComponentLink3Description=https://datasheet.ciiva.com/7830/485442-7830655.pdf?src-supplier=Element14, ComponentLink3URL=https://datasheet.ciiva.com/7830/485442-7830655.pdf?src-supplier=Element14, ComponentLink4Description=https://datasheet.ciiva.com/22743/485442-22743070.pdf?src-supplier=Element14, ComponentLink4URL=https://datasheet.ciiva.com/22743/485442-22743070.pdf?src-supplier=Element14, ComponentLink5Description=https://datasheet.ciiva.com/48425/era-eng-tds-48425609.pdf?src-supplier=Distrelec, ComponentLink5URL=https://datasheet.ciiva.com/48425/era-eng-tds-48425609.pdf?src-supplier=Distrelec, ComponentLink6Description=https://datasheet.ciiva.com/48536/era-eng-tds-48536668.pdf?src-supplier=Distrelec, ComponentLink6URL=https://datasheet.ciiva.com/48536/era-eng-tds-48536668.pdf?src-supplier=Distrelec, ComponentLink7Description=https://datasheet.ciiva.com/16395/aoa0000ce26-16395272.pdf?src-supplier=Future+Electronics, ComponentLink7URL=https://datasheet.ciiva.com/16395/aoa0000ce26-16395272.pdf?src-supplier=Future+Electronics, Construction=Rectangular, Contact Plating=Tin, Depth=1.25mm, Features="Automotive AEC-Q200", Height=0.5mm, Lead Free="Lead Free", Length=2mm, Military Standard=Not, Mounting Technology="Surface Mount", Number of Terminations=2, Packaging="Tape and Reel", Part Number=ERA6AEB472V, Pins=2, Power Rating=125mW, Pricing="1=0.13, 10=0.075, 50=0.075, 100=0.068, 1000=0.047, 10000=0.034 (USD)", Reach SVHC Compliant=No, RoHS=Yes, RoHS Compliant=Yes, Series=ERA-6A, Stock=30218, Supplier=Mouser, Technology="METAL FILM", Termination=SMD/SMT, Tolerance=0.1%, Voltage Rating (DC)=100V, Width=1.25mm
SW1 SW2: library part CMP-2000-07511-1, "FSMSM Push Button Switch, 50 mA, -35 to 85 degC, 2-Pin SMD, RoHS, Bulk", Case\/Package=SMD/SMT, Contact Current Rating=50mA, Contact Resistance=100mOhm, Manufacturer="TE Connectivity", Max Operating Temperature=85degC, Max Voltage Rating (DC)=12V, Min Operating Temperature=-35degC, Operating Force=180gf, Package Description="2-Pin Surface Mount Device, Body 6 x 3.5 mm, Pitch 9.19 mm", Package Quantity=1000, Voltage Rating (DC)=24V, Actuator Length=1.07mm, Actuator Material=Polyamide, Contact Material=Brass, Contact Plating=Silver, Current Rating=50mA, Datasheet URL=http://www.te.com/commerce/DocumentDelivery/DDEController?Action=showdoc&DocId=Customer+Drawing%7F1437566-3%7FC2%7Fpdf%7FEnglish%7FENG_CD_1437566-3_C2_1437566_3_1_c.dwg.pdf%7F1437566-3, Datasheet Version="Rev. C2, 08/2014", Electrical Life=20000Cycles, ELV=Compliant, Illumination Type=Illuminated, Lead Free=LeadFree, Manufacturer URL=http://www.te.com/, Mechanical Life=20000Cycles, Mount=SurfaceMount, Mounting Technology=SurfaceMount, Orientation=Straight, Package Reference=FSMSM, Packaging=LoosePiece, REACH SVHC=Unknown, RoHSCompliant=true, Switch Travel=0.25mm, Termination=GullWing, Throw Configuration=SPST
U1: "No Description Available", Mfr_Name=onsemi, RefDes=RefDes, Type=Type
U2: library part TUSB320IRWBR, "No Description Available", Mfr_Name="Texas Instruments", RefDes=RefDes, Type=TYPE
U3: "No Description Available", Mfr_Name="Texas Instruments", RefDes=RefDes, Type=TYPE

## Via types
v1: diameter 50, hole 28, Top Layer to Bottom Layer, 31 vias
v2: diameter 35, hole 15, Top Layer to Bottom Layer, 4 vias

## Nets (pads, with @x,y where several pads share a name; then routed paths per layer and width w, separated by ;. In a path a pad name is that pad's centre, name@x,y a point inside that pad or via, vN(x,y) a via of type N, cw(c..) or ccw(c..) an arc to the next point about the centre after c; other vN are vias at no path point)
A5: J1.A5 P2.1 P3.1 U2.1 | length 2816.7
  Top Layer w10: P3.1 5295,1991.34 5280.31,2006.02 5278.98,2006.02 5210,2075 5210,2310 5265,2365 v1(5665,2365) 5877.6,2365 P2.1 ; U2.1 6291.1,1761.65 ; v1(6230,1705) 6234.45,1705 6291.1,1761.65 ; J1.A5 6434.84,1905.39 6291.1,1761.65
  Bottom Layer w10: v1(5665,2365) 5665,2270 v1(6230,1705)
A9: C3.1 J1.A9 J1.B9 P2.3 P2.4 P2.7 R1.2 U1.3 | length 3453.1
  Top Layer w10: P2.4 P2.3 5980,2230 6085,2125 6215.86,2125 6270.86,2070 U1.3 6436.14,2070 C3.1@6521.14,1985 ; R1.2 6395,1910 6470,1985 C3.1@6521.14,1985 ; P2.7 6180,2408.74 6194.69,2423.43 6231.26,2460 6410,2460 6855,2015 6855,1845 6710,1700 6630,1700 6610,1720 6610,1791.65 6683.58,1865.24 J1.B9 6745.24,1865.24 6770,1890 6770,1965 6750.08,1984.92 J1.A9 6530.08,1984.92 C3.1 C3.1@6521.14,1985
ADDR: C1.1 C2.2 C3.2 C4.2 C5.2 C6.2 C7.2 J1.A12 J1.B12 J8.1 LED1.1 LED2.1 LED3.1 LED4.1 LED5.1 P1.3 P2.5 P2.6 P3.4 P3.6 P3.9 P4.2 P4.4 P4.5 P4.6 P5.2 P5.4 P5.5 P5.6 SW2.1 U2.5 U2.10 U2.11 U3.41 | length 15505.9
  Top Layer w10: P5.2 P5.4 P5.6 P5.5 P4.6 ; P4.2 P4.4 P4.6 ; U3.41 3698.04,1714.44 3719.22,1735.62 C5.2 3859.09,1735.62 C4.2 4103.11,1734.12 J8.1 4393.4,1826.6 4505,1715 4505,1443.34 4424.2,1362.55 C7.2 4590.58,1359.6 4725.58,1224.6 SW2.1 5399.6,1224.6 LED5.1 ; C6.2 3702.83,1417.35 v1(3770.58,1349.6) ; v1(4645,2165) 4645,2285 4950,2590 ; P3.4 P3.6 ; v1(5695,1850) P3.9 5695,1991.34 5680.31,2006.02 5645.28,2006.02 5544.72,2106.57 5509.69,2106.57 5495,2121.26 P3.6 ; LED3.1 5970,1600 v1(5910,1660) C2.2 5969.74,1660.26 5969.74,1739.74 U2.10 U2.11 ; U2.5 5970,1815 5894.04,1890.96 5894.04,2220.96 5805,2310 5540,2310 5495,2265 P3.6 ; C1.1 6081.65,2041.99 6081.65,2093.35 5925,2250 5925,2635 5965,2675 ; J1.B12 6761.81,1816.81 6810,1865 6810,1990 6766.65,2033.35 J1.A12 6563.35,2033.35 6538.86,2057.83 C3.2 6521.14,2057.83 6428.98,2150 6256.06,2150 6080,2326.06 P2.5 P2.6 6080,2621.34 6026.34,2675 5965,2675 ; P4.6 P4.5 2260,2126.34 2723.66,2590 4950,2590 ; 4950,2590 5130,2590 P1.3 5335,2675 5965,2675
  Bottom Layer w10: v1(3770.58,1349.6) 4195.58,1774.6 J8.1 4533.99,2165 v1(4645,2165) ; LED5.1 5500,1225 5660,1225 LED4.1 5760,1225 5920,1225 LED3.1 6020,1225 6180,1225 LED2.1 6280,1225 6440,1225 LED1.1 ; v1(5695,1850) 5695,1839.18 5705.78,1828.39 5705.78,1809.22 5855,1660 v1(5910,1660)
B5: J1.B5 P2.2 P3.3 U2.2 | length 3302.6
  Top Layer w10: P3.3 5380.31,1935.31 5380.31,1893.98 5378.98,1893.98 5335,1850 5265,1850 5150,1965 5150,2305.02 5424.98,2580 v1(5755,2580) P2.2 ; U2.2 6230,1777.4 ; v1@6178.7,1828.7 6230,1777.4 ; 6327.4,2580 6330,2582.6 ; J1.B5 6682.4,1944.76 6673.62,1935.98 6673.62,1935.86 6667.76,1930 6438.24,1930 6285.64,1777.4 6230,1777.4
  Bottom Layer w10: v1(5755,2580) 5755,2255 v1(6180,1830)
BTN: J4.1 SW1.1 U3.33 | length 3375.8
  Top Layer w10: U3.33 3687.85,1556.96 3990.22,1254.6 J4.1 4350.18,1110 6715,1110 6755.79,1150.79 6758.5,1150.79 6785,1177.28 SW1.1
ID: J4.4 P3.8 R3.1 U2.9 U3.36 | length 3401.8
  Top Layer w10: U3.36 3692.44,1616.01 3903.86,1404.6 J4.4 ; v1(4920,1310) 4920,1360 R3.1 5180,1365 5380,1565 5620,1565 v1(5755,1700) 5918.03,1700 5954.25,1736.22 U2.9 ; P3.8 v1@5595,2255
  Bottom Layer w10: J4.4 4320.18,1290 4604.68,1290 4624.68,1310 v1(4920,1310) ; v1(5595,2270) 5595,1860 v1(5755,1700)
INT#: J4.3 P3.11 R2.1 U2.6 U3.35 | length 3288.7
  Top Layer w10: U3.35 3690.91,1596.33 3932.64,1354.6 J4.3 ; v1(4920,1950) 4923.02,1950 5014.07,2041.05 5025.93,2041.05 5331.98,1735 5645,1735 5780.31,1870.31 5780.31,1935.31 P3.11 5795,1908.66 5809.69,1893.98 5859.33,1893.98 5949.41,1803.9 5953.19,1803.9 5954.25,1802.83 U2.6
  Bottom Layer w10: J4.3 4140,1420.18 4140,1605 4190,1655 4628.02,1655 4920,1946.98 v1(4920,1950)
LED0: J5.1 R4.1 U3.49 | length 4673.9
  Top Layer w10: U3.49 3559.37,1929.19 3559.37,1961.53 3777.44,2179.6 3807.25,2179.6 3867.25,2239.6 4330.4,2239.6 4617.95,1952.05 4617.95,1447.05 4815,1250 5285,1250 v1(5320,1285) ; v1(6530,1500) 6530,1415.94 R4.1
  Bottom Layer w10: v1(5320,1285) 5320,1115 5345,1090 6609.14,1090 6665,1145.86 6665,1287.05 6530,1422.05 v1(6530,1500)
LED1: J5.6 R5.1 U3.54 | length 4795.4
  Top Layer w10: U3.54 3459.79,2009.72 3620.58,2170.51 J5.6 ; R5.1 6270,1550 v1(6335,1615)
  Bottom Layer w10: J5.6 3620.58,1755.41 3490,1624.83 3490,1170 3535,1125 3900,1125 3996.6,1221.6 4911.6,1221.6 5245,1555 6275,1555 v1(6335,1615)
LED2: J5.7 R6.1 U3.55 | length 4346.4
  Top Layer w10: U3.55 3440.11,2024.88 3570.58,2155.35 J5.7 ; R6.1 v1@6010.94,1504.06
  Bottom Layer w10: J5.7 3570.58,1740.58 3460,1630 3460,1160 3520,1100 5005.5,1100 5435.5,1530 5980.94,1530 v1(6010.94,1500)
LED3: J5.8 R7.1 U3.56 | length 4039.7
  Top Layer w10: U3.56 3420.42,2040.04 3520.58,2140.19 J5.8 ; v1(5750,1485) 5750,1415.94 R7.1
  Bottom Layer w10: J5.8 3520.58,1729.61 3445,1654.03 3445,1153.79 3513.79,1085 5030.5,1085 5270.5,1325 5590,1325 v1(5750,1485)
LED4: J9.1 R9.1 U3.57 | length 7064.6
  Top Layer w10: J9.1 3400.74,2170.99 U3.57 3400.74,1700.74 2900,1200 2900,1110 2940,1070 6775,1070 6845,1140 6845,1240 6820,1265 6750,1265 6670,1185 5525,1185 5489.53,1220.47 5490.47,1221.42 R9.1
NetC1_2: C1.2 U1.2 | length 116
  Top Layer w10: C1.2 6207.5,2032.5 U1.2
NetLED1_2: LED1.2 R4.2 | length 140
  Top Layer w10: LED1.2 R4.2
NetLED2_2: LED2.2 R5.2 | length 140.4
  Top Layer w10: R5.2 6330,1414.06 LED2.2
NetLED3_2: LED3.2 R6.2 | length 140
  Top Layer w10: LED3.2 R6.2
NetLED4_2: LED4.2 R7.2 | length 140
  Top Layer w10: LED4.2 R7.2
NetLED5_2: LED5.2 R9.2 | length 140.2
  Top Layer w10: R9.2 5550,1414.53 LED5.2
NRST: C7.1 J4.6 R8.1 SW2.2 U3.38 | length 1099.3
  Top Layer w10: U3.38 3695.49,1655.38 3846.28,1504.6 J4.6 4365.58,1504.6 R8.1 4376.96,1513.22 C7.1 4376.96,1225.97 SW2.2
PA1: J4.2 U3.34 | length 684.2
  Top Layer w10: U3.34 3689.38,1576.64 3961.43,1304.6 J4.2
PA2: J8.2 U3.42 | length 620.6
  Top Layer w10: U3.42 3696.51,1734.12 3838.98,1876.6 J8.2
PA3: J8.3 U3.43 | length 633.1
  Top Layer w10: U3.43 3694.98,1753.81 3867.77,1926.6 J8.3
PA4: J8.4 U3.44 | length 645.7
  Top Layer w10: U3.44 3693.45,1773.49 3896.56,1976.6 J8.4
PA5: J8.5 U3.45 | length 658.2
  Top Layer w10: U3.45 3689.16,1793.18 3922.58,2026.6 J8.5
PA6: J8.6 U3.46 | length 670.8
  Top Layer w10: U3.46 3682.64,1812.86 3946.37,2076.6 J8.6
PA12: J2.5 U3.5 | length 494.9
  Top Layer w10: J2.5 2976.68,1773.49 U3.5
PA13: J2.6 U3.6 | length 482.3
  Top Layer w10: J2.6 2946.37,1753.81 U3.6
PA14: J2.7 U3.7 | length 469.7
  Top Layer w10: J2.7 2916.05,1734.12 U3.7
PA15: J2.8 U3.8 | length 457.2
  Top Layer w10: J2.8 2885.58,1714.6 3186.98,1714.6 U3.8
PA16: J6.1 U3.9 | length 449.7
  Top Layer w10: J6.1 2867.74,1694.75 U3.9
PA17: J6.2 U3.10 | length 462.3
  Top Layer w10: J6.2 2898.05,1675.07 U3.10
PA18: J6.3 U3.11 | length 474.8
  Top Layer w10: J6.3 2928.37,1655.38 U3.11
PA21: J3.1 U3.17 | length 413.3
  Top Layer w10: J3.1 2993.73,1179.6 3262.94,1448.81 U3.17
PA22: J3.2 U3.18 | length 400.6
  Top Layer w10: J3.2 3281.86,1417.92 3281.86,1480.38 U3.18
PA23: J3.8 U3.24 | length 325.3
  Top Layer w10: J3.8 3400.74,1236.8 U3.24
PA24: J7.1 U3.25 | length 350.5
  Top Layer w10: U3.25 3420.42,1297.71 J7.1
PA25: J7.2 U3.26 | length 363
  Top Layer w10: U3.26 3440.11,1328.02 J7.2
PA26: J7.6 U3.30 | length 423.8
  Top Layer w10: U3.30 3520,1480 3520,1430.18 3737.58,1212.6 3755.53,1212.6 J7.6
PA27: J7.7 U3.31 | length 448.1
  Top Layer w10: U3.31 3539.69,1480 3539.69,1440.49 3752.58,1227.6 3790.53,1227.6 J7.7
PA30: J4.5 U3.37 | length 646.6
  Top Layer w10: U3.37 3693.97,1635.7 3875.07,1454.6 J4.5
PA31: J4.7 U3.39 | length 621.5
  Top Layer w10: U3.39 3697.02,1675.07 3817.5,1554.6 J4.7
PB0: J8.7 U3.47 | length 683.4
  Top Layer w10: U3.47 3634.7,1833.22 3679.21,1833.22 3972.58,2126.6 J8.7
PB1: J8.8 U3.48 | length 695.9
  Top Layer w10: U3.48 3666.36,1852.23 3990.73,2176.6 J8.8
PB4: J5.4 U3.52 | length 403.3
  Top Layer w10: U3.52 3499.16,1984.41 3716.35,2201.6 3716.35,2235.37 J5.4
PB5: J5.5 U3.53 | length 390.7
  Top Layer w10: U3.53 3479.48,1994.56 3670.58,2185.67 J5.5
PB6: J9.2 U3.58 | length 352.5
  Top Layer w10: J9.2 3381.05,2140.68 U3.58
PB7: J9.3 U3.59 | length 365.1
  Top Layer w10: J9.3 3361.37,2110.36 U3.59
PB8: J9.4 U3.60 | length 377.6
  Top Layer w10: J9.4 3341.68,2080.05 U3.60
PB9: J9.5 U3.61 | length 390.2
  Top Layer w10: J9.5 3322,2049.73 U3.61
PB10: J9.6 U3.62 | length 402.8
  Top Layer w10: J9.6 3302.31,2019.42 U3.62
PB11: J9.7 U3.63 | length 415.3
  Top Layer w10: J9.7 3282.63,1989.1 U3.63
PB12: J9.8 U3.64 | length 428.8
  Top Layer w10: J9.8 2983.73,2239.6 3262.94,1960.38 U3.64
PB13: J2.1 U3.1 | length 545.1
  Top Layer w10: J2.1 3097.94,1852.23 U3.1
PB14: J2.2 U3.2 | length 532.5
  Top Layer w10: J2.2 3067.63,1832.55 U3.2
PB15: J2.3 U3.3 | length 520
  Top Layer w10: J2.3 3037.31,1812.86 U3.3
PB16: J2.4 U3.4 | length 507.4
  Top Layer w10: J2.4 3007,1793.18 U3.4
PB17: J6.6 U3.14 | length 512.5
  Top Layer w10: J6.6 3019.31,1596.33 U3.14
PB18: J6.7 U3.15 | length 525.1
  Top Layer w10: J6.7 3049.63,1576.64 U3.15
PB19: J6.8 U3.16 | length 537.6
  Top Layer w10: J6.8 3079.94,1556.96 U3.16
PB20: J3.3 U3.19 | length 388
  Top Layer w10: J3.3 3302.31,1388.37 U3.19
PB21: J3.4 U3.20 | length 375.5
  Top Layer w10: J3.4 3322,1358.06 U3.20
PB22: J3.5 U3.21 | length 362.9
  Top Layer w10: J3.5 3341.68,1327.74 U3.21
PB23: J3.6 U3.22 | length 350.4
  Top Layer w10: J3.6 3361.37,1297.43 U3.22
PB24: J3.7 U3.23 | length 337.8
  Top Layer w10: J3.7 3381.05,1267.11 U3.23
PB25: J7.3 U3.27 | length 375.6
  Top Layer w10: U3.27 3459.79,1358.34 J7.3
PB26: J7.4 U3.28 | length 388.1
  Top Layer w10: U3.28 3479.48,1388.65 J7.4
PB27: J7.5 U3.29 | length 400.7
  Top Layer w10: U3.29 3499.16,1418.97 J7.5
PORT: P3.5 U2.3 | length 1502.7
  Top Layer w10: P3.5 5495,1991.34 5480.31,2006.02 5443.98,2006.02 5350,2100 5350,2230 5450,2330 5806.21,2330 6040,2096.21 6040,1841.34 6001.5,1802.83 U2.3
PS_EN: U1.1
S1: J1.S1
S2: J1.S2 P2.9 | length 552.4
  Top Layer w10: P2.9 6280,2326.06 6294.69,2311.38 6468.62,2311.38 6684.84,2095.16 J1.S2
S3: J1.S3 P2.10 | length 1245.4
  Top Layer w10: P2.10 6280,2538.66 6294.69,2523.98 6511.02,2523.98 6910,2125 6910,1820 6864.86,1774.86 6864.86,1764.93 6854.93,1755 J1.S3
S4: J1.S4 P2.8 | length 890
  Top Layer w10: P2.8 6180,2538.66 6233.66,2485 6439.41,2485 6829.25,2095.16 J1.S4
SCL: J5.2 P3.10 R11.1 U2.8 U3.50 | length 3547.7
  Top Layer w10: U3.50 3539.69,1929.19 3539.69,1973.7 3765.58,2199.6 3780.58,2199.6 J5.2 3920.99,2340 4392.24,2340 5072.05,1660.2 R11.1 5120.2,1615 5585,1615 5731.65,1761.65 5901.65,1761.65 ; P3.10 5697.68,2159.91 v2(5697.68,2057.32) ; v2(5870,1730) 5901.65,1761.65 ; U2.8 5901.65,1761.65
  Bottom Layer w10: v2(5697.68,2057.32) 5747.21,2007.79 5747.21,1807.79 5825,1730 v2(5870,1730)
SDA: J5.3 P3.12 R10.1 U2.7 U3.51 | length 3480.3
  Top Layer w10: U3.51 3518.85,1982.88 3770.58,2234.61 J5.3 3915.99,2385 v1(4215,2385) ; v1(5165,1660) 5165.2,1660.2 R10.1 ; R10.1@5245,1655 5595,1655 5717.4,1777.4 5847.6,1777.4 ; v2(5795,2055) P3.12 ; v2(5815,1810) 5847.6,1777.4 ; U2.7 5847.6,1777.4
  Bottom Layer w10: v1(4215,2385) 4550,2385 5165,1770 v1(5165,1660) ; v2(5795,2055) 5795,1835.96 5815,1815.96 v2(5815,1810)
SWCLK: J6.5 U3.13 | length 500
  Top Layer w10: J6.5 2989,1616.01 U3.13
SWDIO: J6.4 U3.12 | length 487.4
  Top Layer w10: J6.4 2958.68,1635.7 U3.12
VBUS_DET: P3.7 R1.1 U2.4 | length 2136
  Top Layer w10: v1(5585,1790) 5585,1940 P3.7 ; v1(5960,2115) 5960,2108.43 5985,2083.43 R1.1 5985.75,1909.25 U2.4
  Bottom Layer w10: v1(5585,1790) 5580,1790 5541.17,1828.83 5541.17,2481.17 5710,2650 5805,2650 5840,2615 5840,2235 v1(5960,2115)
VCC: C4.1 C5.1 D1.K J4.8 P1.1 P5.1 P5.3 R8.2 R10.2 R11.2 SW1.2 U3.40 | length 7685.8
  Top Layer w10: P5.3 P5.1 v1(2460,1705) ; U3.40 3698.55,1694.75 3718.71,1674.6 C5.1 3860.11,1674.6 C4.1 4135.11,1675.07 J4.8 4373.06,1604.6 R8.2 4458.47,1690 v1(4459.23,1690) v1@4460,1690 ; P1.1 4990,2430.47 4975.53,2416 D1.K 4975.53,2404 4735,2163.46 v1(4735,2075) 4735,2072.05 5072.05,1735 R11.2 R10.2 5307.76,1735 5347.76,1695 5400,1695 v1(5405,1690) ; v1(6660,1630) 6701.18,1588.82 6758.5,1588.82 6785,1562.32 SW1.2
  Bottom Layer w10: v1(2460,1705) 2460,2110 2880,2530 P1.1 ; v1(4459.23,1690) 4459.23,1799.23 v1(4735,2075) ; v1(5405,1690) 5410,1695 5500,1695 5620,1575 6210,1575 6300,1665 6625,1665 v1(6660,1630)
VCORE: C6.1 J7.8 U3.32 | length 580.2
  Top Layer w10: C6.1 3654.03,1481.15 U3.32 3559.37,1480 3559.37,1447.66 3752.44,1254.6 3810.2,1254.6 3871.53,1193.26 3871.53,1179.6 J7.8
VDD: C2.1 D1.A P1.2 P3.2 P4.1 P4.3 R2.2 R3.2 U2.12 | length 6521.2
  Top Layer w10: P4.3 P4.1 v1(2460,2245) ; R3.2 4928.95,1430 v1(5025,1430) ; R2.2 5020,2160 v1(5060,2200) ; P1.2 5090,2430.47 5104.47,2416 D1.A ; P3.2 v1(5295,2290) ; U2.12 6001.5,1694.92 6030.51,1665.91 C2.1 6030.51,1654.09 6036.42,1660 v1(6100,1660)
  Bottom Layer w10: v1(2460,2245) 2800,2585 5035,2585 P1.2 5290,2330 5290,2295 v1(5295,2290) ; v1(5025,1430) 5220,1625 5220,1827.34 5060,1987.34 v1(5060,2200) 5205,2200 v1(5295,2290) ; v1(6100,1660) 6035,1595 5645,1595 5295,1945 v1(5295,2290)

## Silkscreen, mask and mechanical layers (free items; w line width, h text height)
Top Overlay:
  text "VCC" at 4937,2597 h30
  text "VBAT" at 5037,2597 h30
  text "GND" at 5167,2597 h30
  text "LED5" at 3348.58,2306.6 h30 r90
  text "LED4" at 3538.58,2306.6 h30 r90
  text "LED3" at 3588.58,2306.6 h30 r90
  text "LED2" at 3633.58,2306.6 h30 r90
  text "SDA" at 3788.58,2306.6 h30 r90
  text "SCL" at 3833.58,2306.6 h30 r90
  text "LED1" at 3883.58,2306.6 h30 r90
  text "GND" at 5402,2242 h30
  text "SCL" at 5708,2242 h30 r90
  text "SDA" at 5813.58,2241.6 h30 r90
  text "VBAT" at 2357,2167 h30
  text "VBAT" at 5112,2147 h30
  text "GND" at 2157,2118 h30 r270
  text "GND" at 4047.58,1811.6 h30
  text "GND" at 2264.84,1761.81 h30
  text "GND" at 2374.84,1761.81 h30
  text "VCC" at 2372,1622 h30
  text "VCC" at 4057.58,1591.6 h30
  text "GND" at 2157,1578 h30 r270
  text "NRST" at 4027.58,1491.6 h30
  text "SWDIO" at 2562.58,1436.6 h30
  text "ID" at 4092.58,1391.6 h30
  text "SWCLK" at 2557.58,1386.6 h30